# EAGLE board RM3100-XIAO (EAGLE 8.0.0)
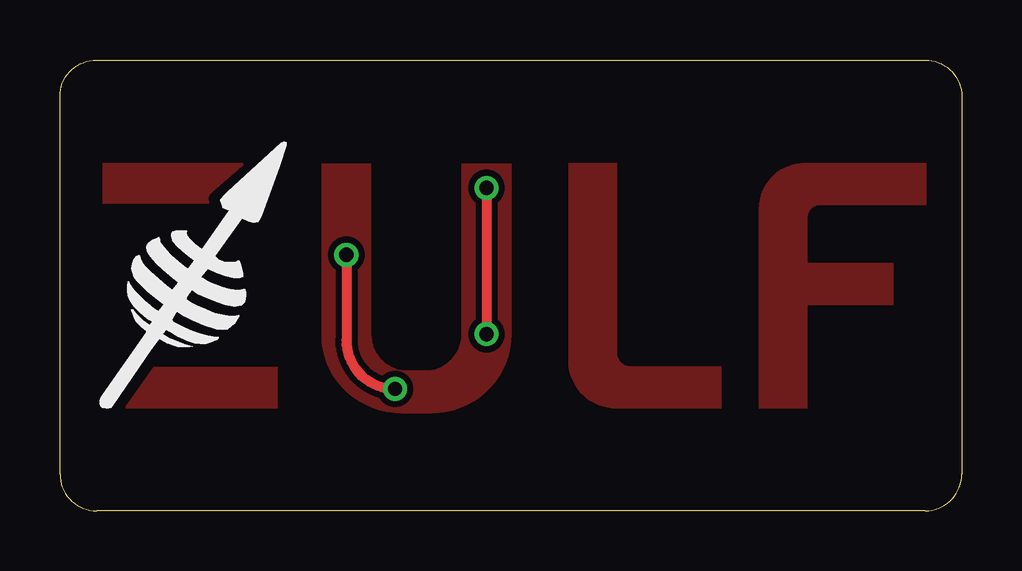
[diagram p0: board, top side]
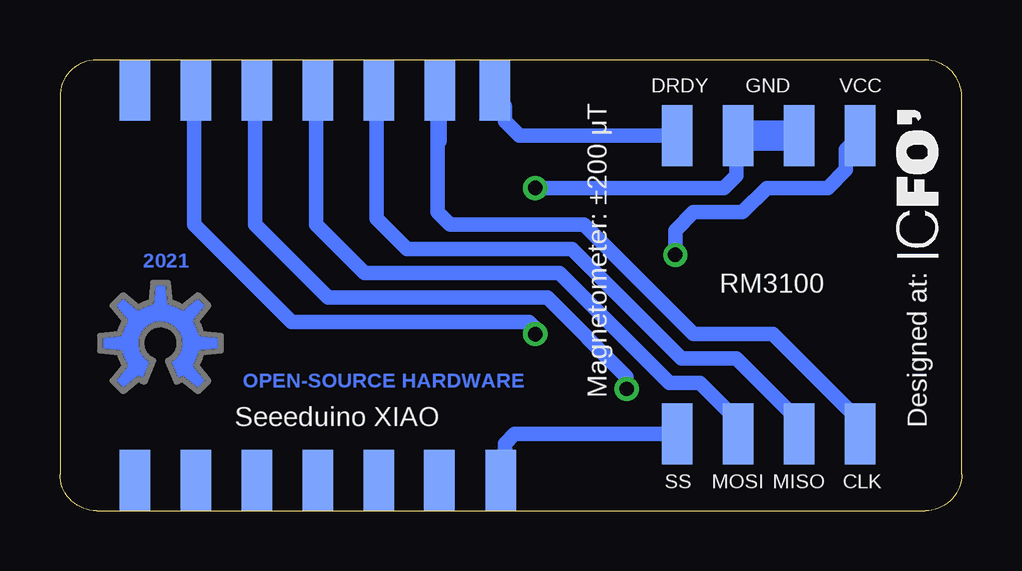
[diagram p1: board, bottom side, seen from below]

Size 37.59 x 18.8 mm. Coordinates in mm from the lower left corner, seen from the top.
Outline: 1.52,18.8 36.07,18.8 arc-90 37.59,17.27 37.59,1.52 arc-90 36.07,0 1.52,0 arc-90 0,1.52 0,17.27 arc-90 1.52,18.8
Copper layers (1*16): Top 0.035mm / dielectric 1.5mm / Bottom 0.035mm
Design rules "default": minimum track width 10mil, minimum drill 24mil, track to track 8mil, track to pad 8mil, pad to pad 8mil, via to via 8mil, smd to smd 8mil, copper to edge 40mil, drill to drill 8mil, minimum pad ring 10mil, minimum via ring 8mil, stop-mask expansion 4mil, vias tented up to drill 0mil, thermal gap 10mil

## Footprints (pad centres in the part's own frame; a part is rotated, then mirrored left to right if it is on the bottom)
SMD1,27-2,54 = smd 1.27 x 2.54: 1 0,0

## Placement (x,y rotation side)
0  [SMD1,27-2,54]  34.46,1.27 0 bottom
1  [SMD1,27-2,54]  31.92,1.27 0 bottom
2  [SMD1,27-2,54]  29.38,1.27 0 bottom
3  [SMD1,27-2,54]  26.84,1.27 0 bottom
3V3  [SMD1,27-2,54]  29.38,17.53 0 bottom
4  [SMD1,27-2,54]  24.3,1.27 0 bottom
5  [SMD1,27-2,54]  21.79,1.27 0 bottom
6  [SMD1,27-2,54]  19.22,1.27 0 bottom
7  [SMD1,27-2,54]  19.48,17.53 0 bottom
8  [SMD1,27-2,54]  21.76,17.53 0 bottom
9  [SMD1,27-2,54]  24.3,17.53 0 bottom
10  [SMD1,27-2,54]  26.84,17.53 0 bottom
13  [SMD1,27-2,54]  34.46,17.53 0 bottom
CLK  [SMD1,27-2,54]  4.24,3.2 180 bottom
DRDY  [SMD1,27-2,54]  11.86,15.65 180 bottom
GND  [SMD1,27-2,54]  6.78,15.65 180 bottom
MISO  [SMD1,27-2,54]  6.78,3.2 180 bottom
MOSI  [SMD1,27-2,54]  9.32,3.2 180 bottom
PAD7  [SMD1,27-2,54]  9.32,15.65 180 bottom
PAD10  [SMD1,27-2,54]  31.92,17.53 0 bottom
SS  [SMD1,27-2,54]  11.86,3.2 180 bottom
U$1  [OSHWLOGO_TOP_0.2]  33.4,6.99 0 bottom
VCC  [SMD1,27-2,54]  4.24,15.65 180 bottom

## Library data of the parts
0 1-3 3V3 4-10 13 CLK DRDY GND MISO MOSI PAD7 PAD10 SS VCC = wirepad
U$1 = adafruit

## Nets
CLK: 8.1 CLK.1
DRDY: 7.1 DRDY.1
GND: GND.1 PAD7.1 PAD10.1
MISO: 9.1 MISO.1
MOSI: 10.1 MOSI.1
N$5: 0.1
N$6: 1.1
N$7: 2.1
N$14: 3.1
N$15: 4.1
N$16: 5.1
N$18: 13.1
SS: 6.1 SS.1
VCC: 3V3.1 VCC.1

## Tracks (layer width: path | path; a pad name or v marks a point on that pad's centre or on a via)
CLK
  Bottom 0.61: 21.76,16.51 8.1 | 21.76,16.51 21.76,15.41 | 21.76,16.51 21.84,16.43 21.84,12.45 21.34,11.94 15.75,11.94 11.18,7.37 7.87,7.37 4.24,3.73 CLK.1
DRDY
  Bottom 0.61: DRDY.1 18.44,15.65 19.05,16.26 19.05,16.85 7.1
GND  (via drill 0.6)
  Top 0.406: v17.78,13.46 v17.78,7.37
  Bottom 0.61: v17.78,7.37 17.78,7.62 18.03,7.87 27.94,7.87 32,11.94 32,16.94 PAD10.1 | v17.78,13.46 9.91,13.46 9.4,13.97 9.4,15.57 PAD7.1
  Bottom 1.27: GND.1 PAD7.1
MISO
  Bottom 0.61: 9.1 24.38,16.94 24.38,12.19 23.11,10.92 16.26,10.92 11.68,6.35 9.4,6.35 6.78,3.73 MISO.1
MOSI
  Bottom 0.61: 10.1 26.92,16.94 26.92,11.94 24.89,9.91 16.76,9.91 12.19,5.33 10.92,5.33 9.32,3.73 MOSI.1
N$1
  pour Top: 1.8,14.5 7.62,14.5 7.65,14.45 7.59,14.4 6.32,13.28 6.22,13.18 6.17,13.08 6.15,13 6.17,12.93 6.2,12.88 6.2,12.83 6.17,12.8 1.8,12.8
N$2
  pour Top: 2.77,4.27 2.77,4.34 3.94,5.99 9.04,5.99 9.04,4.27
N$3
  pour Top: 36.09,14.5 36.09,12.75 31.67,12.75 arc90 31.14,12.22 31.14,10.34 34.72,10.34 34.72,8.59 31.14,8.59 31.14,4.27 29.16,4.27 29.16,12.6 arc-90 31.06,14.5
N$4
  pour Top: 21.21,14.5 23.19,14.5 23.19,6.6 arc90 23.77,6.02 27.56,6.02 27.56,4.27 23.19,4.27 arc-90 21.21,6.25
N$34
  pour Top (isolate 0.254): 10.92,14.48 12.95,14.48 12.95,7.37 arc90 14.48,5.84 15.24,5.84 arc90 16.76,7.37 16.76,14.48 18.8,14.48 18.8,7.37 arc-90 15.49,4.06 14.22,4.06 arc-90 10.92,7.37
SS
  Bottom 0.61: SS.1 18.64,3.2 19.05,2.79 19.05,1.95 6.1
VCC  (via drill 0.6)
  Top 0.406: v11.94,10.67 11.94,7.11 arc90 v13.97,5.08
  Bottom 0.61: 3V3.1 29.46,16.94 29.46,11.94 26.42,8.89 17.27,8.89 13.97,5.59 v13.97,5.08 | v11.94,10.67 11.94,11.68 11.18,12.45 9.14,12.45 8.13,13.46 5.59,13.46 4.83,14.22 4.83,15.06 VCC.1

## Text on the board
Bottom: 2021 | OPEN-SOURCE HARDWARE
bNames: Magnetometer: ±200 μT | RM3100 | Seeeduino XIAO
_bsilk: Designed at: